# Altium PCB ESP_mudule.pcbdoc (part 4 of 4)
Units mm, origin at the board's own origin, x right, y up, seen from the top; angles counter-clockwise.
Board outline 109.8 x 135.65 mm, 2 copper layers (Top Layer, Bottom Layer); 176 components, 188 nets, 748 pads, 392 vias.
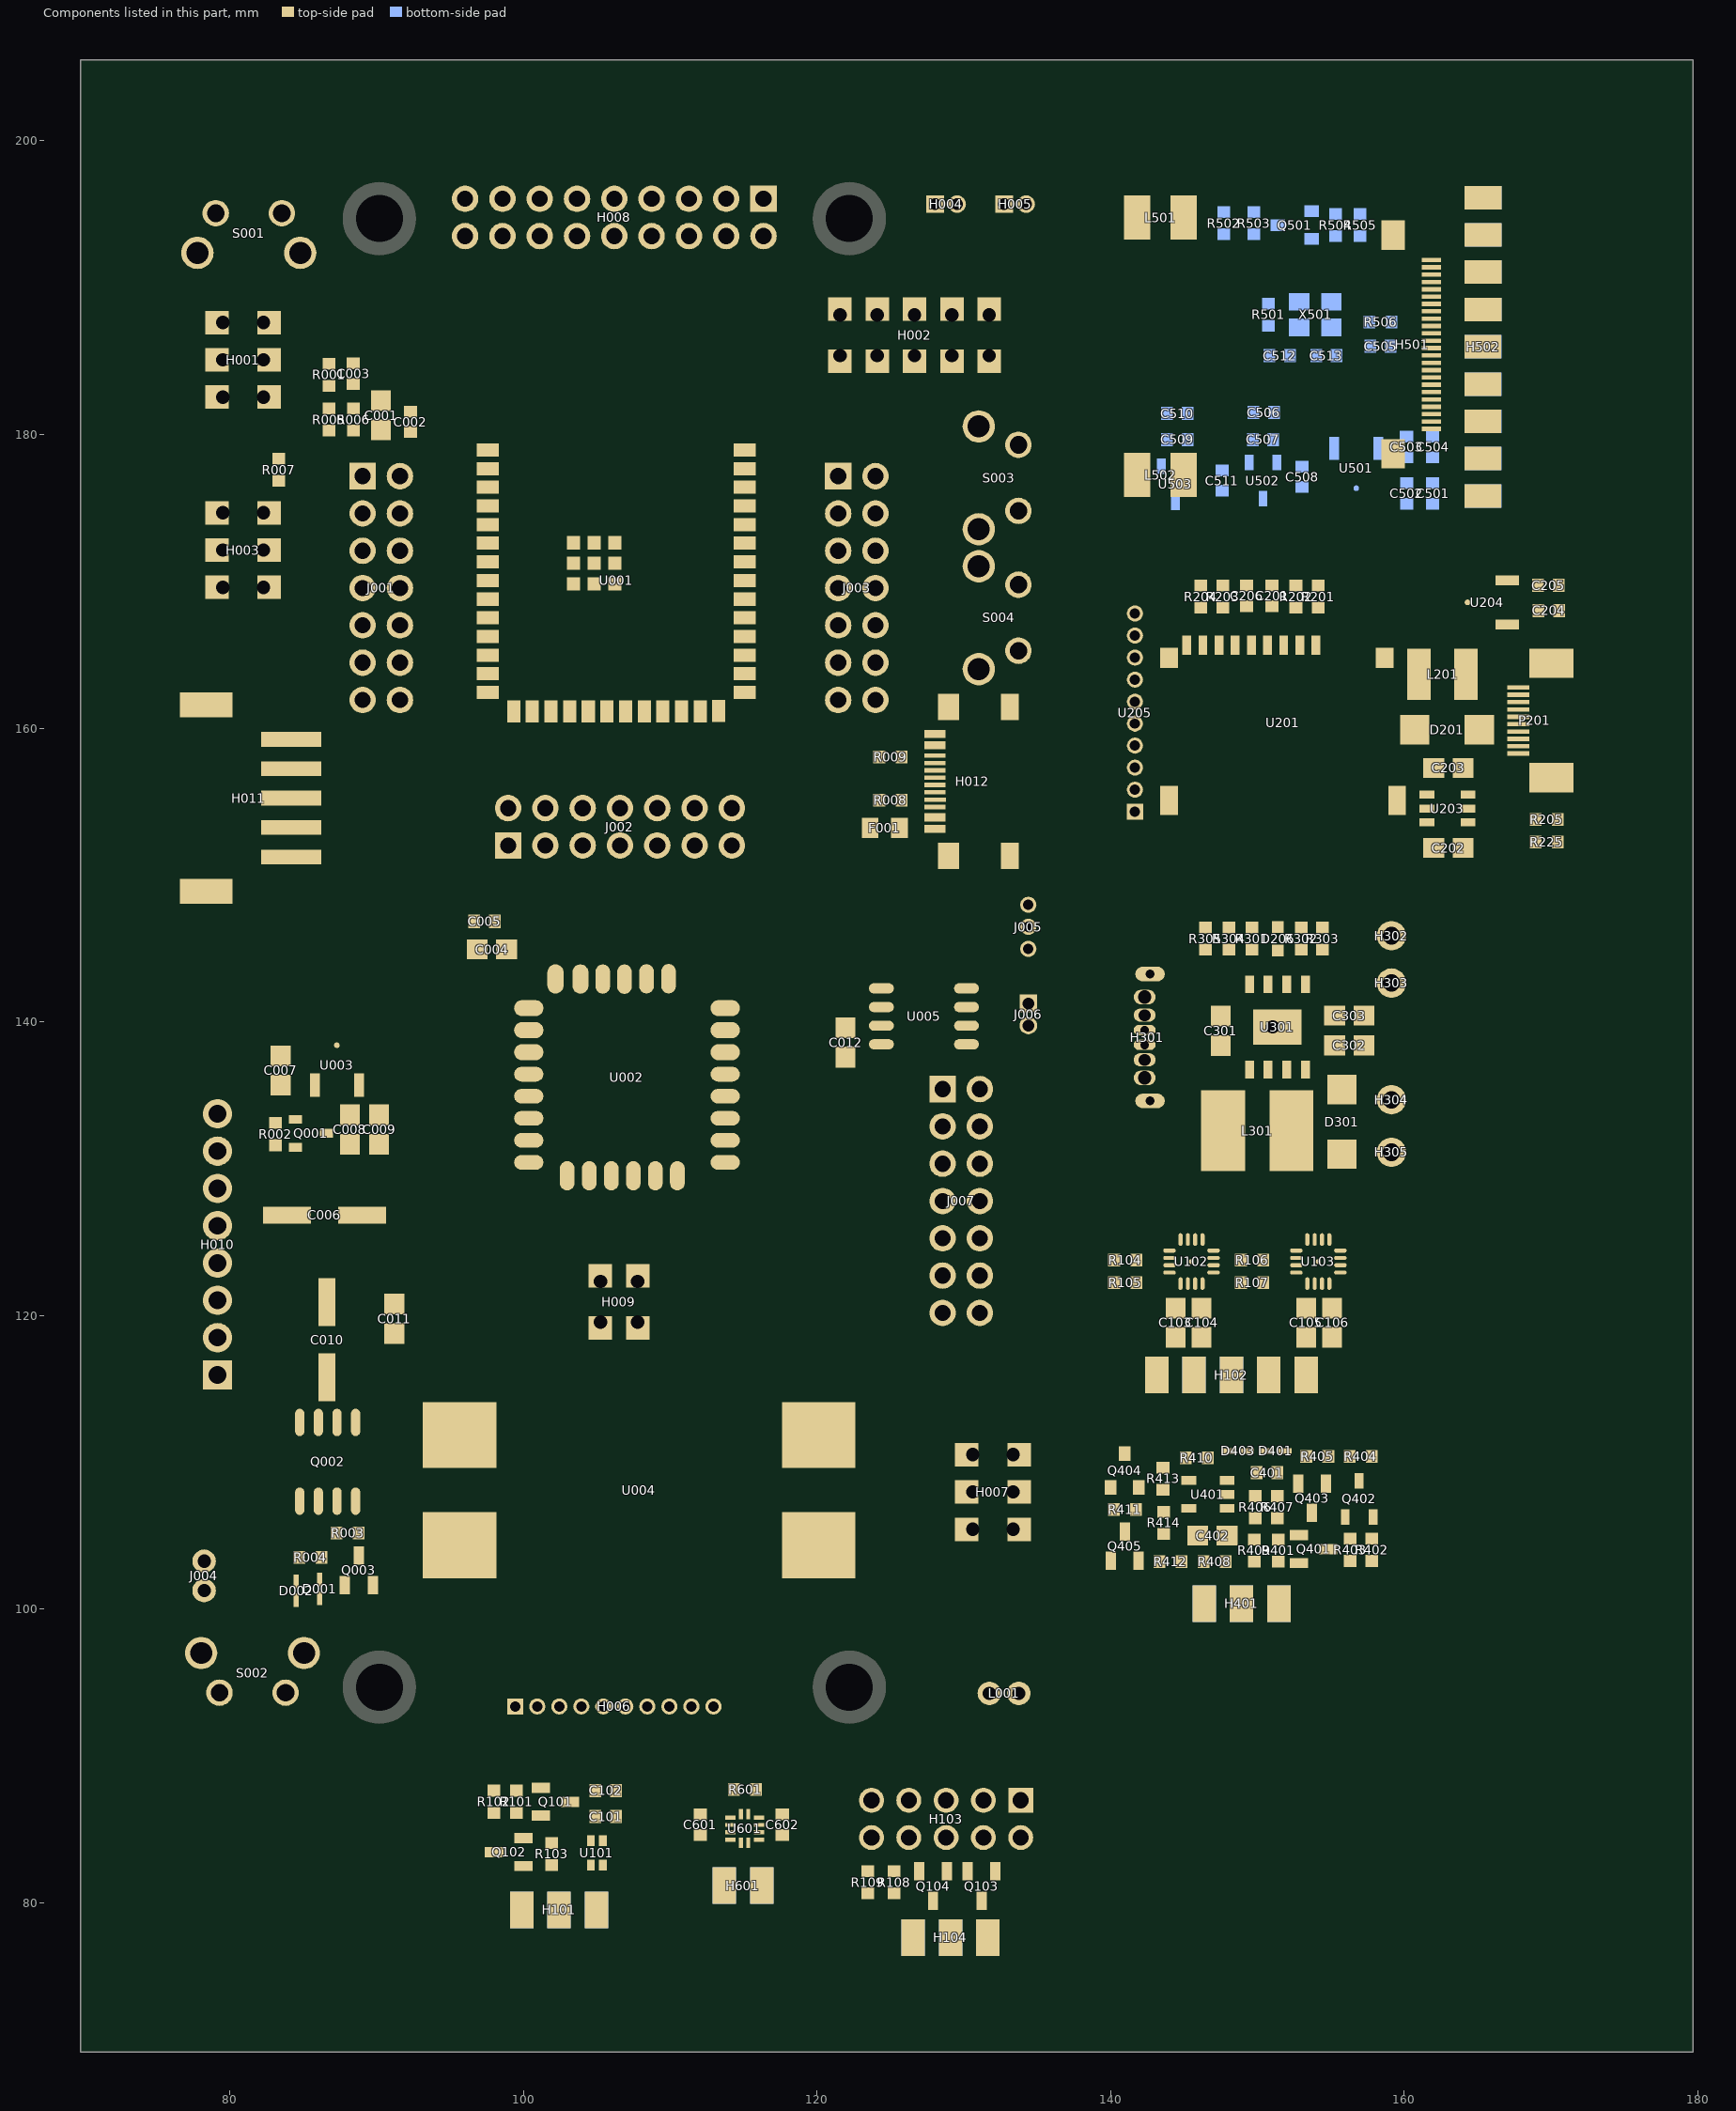
[diagram p4: the components of this part, seen from the top]

## Polygon pours and split planes (outlines as drawn) (continued)
MIC_GND on Top Layer (solid, remove dead copper, pour order 138): 100.622,83.195 100.622,84.725 100.673,84.776 98.939,84.776 98.888,84.725 98.888,83.246 98.939,83.195
DEBUG_5V0 on Top Layer (solid, remove dead copper, pour order 140): 127.372,76.2 127.372,79.661 127.236,79.796 125.81,79.796 125.759,79.745 125.759,76.215 125.774,76.2
DEBUG_3V3 on Top Layer (solid, remove dead copper, pour order 142): 132.185,83.57 132.185,87.701 132.032,87.854 130.553,87.854 130.451,87.752 130.451,85.508 130.247,85.304 128.258,85.304 127.901,84.947 127.901,84.08 128.207,83.774 128.87,83.774 129.023,83.621 131.93,83.621 131.981,83.57
DEBUG_RTS on Top Layer (solid, remove dead copper, pour order 144): 127.34,81.53 127.34,82.805 127.136,83.009 127.136,85.202 127.034,85.304 125.555,85.304 125.402,85.151 125.402,83.06 124.994,82.652 124.79,82.652 124.79,81.721 126.385,81.721 126.575,81.53
DEBUG_DTR on Top Layer (solid, remove dead copper, pour order 146): 123.923,81.734 123.923,83.264 124.586,83.927 124.586,85.253 124.535,85.304 122.856,85.304 122.856,81.832 122.954,81.734
DEBUG_BOOT on Top Layer (solid, remove dead copper, pour order 148): 131.573,79.49 131.573,80.816 130.4,80.816 130.094,80.51 130.094,79.487 131.57,79.487
DEBUG_RESEST on Top Layer (solid, remove dead copper, pour order 150): 127.544,80.816 129.176,80.816 129.278,80.714 129.278,79.272 129.099,79.093 128.808,79.093 128.666,79.235 127.595,79.235 127.544,79.286
$2N3190 on Top Layer (solid, remove dead copper, pour order 152): 132.287,81.53 132.95,81.53 133.15,81.73 133.15,82.198 133.001,82.346 132.746,82.346 132.524,82.569 132.524,82.856 131.776,82.856 131.776,81.513 132.27,81.513
DEBUG_DTR on Top Layer (solid, remove dead copper, pour order 154): 130.441,81.513 130.458,81.53 131.206,81.53 131.206,81.826 131.42,82.04 131.42,82.844 131.408,82.856 129.941,82.856 129.89,82.805 129.89,81.53 129.907,81.513
DEBUG_5V0 on Top Layer (solid, remove dead copper, pour order 156): 134.786,83.621 134.786,87.854 132.95,87.854 132.95,83.603 134.768,83.603
$1N9696 on Top Layer (solid, remove dead copper, pour order 158): 28 vertices, not listed, extent 77.385,93.233 87.687,108.329
$1N5617 on Top Layer (solid, remove dead copper, pour order 160): 18 vertices, not listed, extent 81.516,132.707 88.299,140.306
VCC on Top Layer (solid, remove dead copper, pour order 162): 86.106,132.095 86.106,134.288 86.208,134.39 88.146,134.39 88.401,134.645 88.401,136.43 88.503,136.532 90.747,136.532 90.849,136.43 90.849,132.962 90.798,132.911 87.177,132.911 87.075,132.809 87.075,132.084 86.117,132.084
+12V on Top Layer (solid, remove dead copper, pour order 164): 22 vertices, not listed, extent 84.321,109.553 98.244,119.6
+5V on Top Layer (solid, remove dead copper, pour order 166): 92.226,114.704 116.226,114.704 116.674,114.256 116.674,109.687 116.757,109.604 127.671,109.604 127.671,115 127.365,115.306 118.756,115.306 117.624,116.438 92.022,116.438 92.022,114.806 92.175,114.653
+5V on Top Layer (solid, remove dead copper, pour order 168): 82.23,127.709 82.23,124.904 82.485,124.649 92.787,124.649 93.246,125.108 93.246,126.026 91.359,126.026 91.053,125.72 85.902,125.72 85.8,125.822 85.8,127.658 85.698,127.76 82.281,127.76
+5V on Top Layer (solid, remove dead copper, pour order 170): 132.975,106.34 135.117,106.34 135.27,106.187 135.27,102.821 134.913,102.464 126.345,102.464 125.835,102.974 125.835,104.504 128.13,104.504 128.436,104.198 132.771,104.198 132.975,104.402
+5V on Top Layer (solid, remove dead copper, pour order 172): 121.245,136.838 129.915,136.838 130.17,136.583 130.17,134.798 130.476,134.492 132.006,134.492 132.057,134.543 132.057,137.45 132.006,137.501 127.54,137.501 126.213,138.827 123.285,138.827 122.775,138.317 121.245,138.317
+5V on Top Layer (solid, remove dead copper, pour order 174): 123.03,153.872 123.03,150.914 123.183,150.761 126.753,150.761 126.804,150.71 126.804,152.087 126.753,152.138 124.509,152.138 124.203,152.444 124.203,153.821 124.152,153.872
+5V on Top Layer (solid, remove dead copper, pour order 176): 19 vertices, not listed, extent 115.431,187.686 132.618,197.019
+5V on Top Layer (solid, remove dead copper, pour order 178): 126.647,182.294 135.081,182.294 135.168,182.382 135.168,183.555 126.753,183.555 126.647,183.449
+5V on Top Layer (solid, remove dead copper, pour order 180): 82.434,132.095 82.434,130.871 82.893,130.412 85.033,130.412 85.239,130.618 85.239,132.095
+5V on Top Layer (solid, remove dead copper, pour order 182): 82.128,151.73 82.128,150.149 82.383,149.894 87.075,149.894 87.228,150.047 87.228,151.628 87.126,151.73
+5V on Top Layer (solid, remove dead copper, pour order 184): 79.935,173.814 76.263,173.814 76.263,177.741 79.833,177.741 79.935,177.639
VCC on Top Layer (solid, remove dead copper, pour order 186): 44 vertices, not listed, extent 78.15,132.656 128.997,147.395
VCC on Top Layer (solid, remove dead copper, pour order 188): 52 vertices, not listed, extent 78.303,176.16 96.867,183.779
ESP_BOOT on Top Layer (solid, remove dead copper, pour order 190): 82.026,173.865 85.596,173.865 85.851,174.12 85.851,174.885 85.8,174.936 84.066,174.936 83.811,175.191 83.811,177.18 83.76,177.231 81.975,177.231 81.924,177.18 81.924,173.967
$1N20758 on Top Layer (solid, remove dead copper, pour order 192): 83.199,93.233 82.74,93.692 82.74,98.894 83.964,100.118 83.964,101.06 84.804,101.06 84.831,101.087 84.831,99.914 83.352,98.435 83.352,95.681 83.607,95.426 84.474,95.426 84.882,95.018 84.882,93.335 84.78,93.233
$1N9668 on Top Layer (solid, remove dead copper, pour order 194): 84.168,101.495 84.27,101.393 84.984,101.393 85.137,101.546 86.31,101.546 86.361,101.597 86.361,102.495 85.361,102.495 85.188,102.668 85.188,104.027 84.168,104.027
$1N9446 on Top Layer (solid, remove dead copper, pour order 196): 85.8,103.127 87.177,103.127 87.381,102.923 87.381,100.985 88.217,100.985 88.217,102.495 88.044,102.668 88.044,103.076 87.075,104.045 85.8,104.045
$1N9369 on Top Layer (solid, remove dead copper, pour order 198): 88.452,103.025 88.452,104.606 88.401,104.657 88.401,106.289 88.248,106.442 88.248,108.329 88.299,108.38 89.217,108.38 89.268,108.329 89.268,103.025
POWER_LOCK on Top Layer (solid, remove dead copper, pour order 200): 85.902,101.189 85.902,99.761 86.004,99.659 90.951,99.659 91.053,99.557 91.535,99.557 91.535,100.095 91.512,100.118 86.463,100.118 86.361,100.22 86.361,101.189
ESP_RESET on Top Layer (solid, remove dead copper, pour order 202): 86.31,184.371 90.209,184.371 90.209,185.674 89.982,185.901 86.565,185.901 86.31,185.646
GND on Top Layer (solid, remove dead copper, pour order 204): 32 vertices, not listed, extent 87.942,164.43 116.094,183.861
GND on Top Layer (solid, remove dead copper, pour order 206): 17 vertices, not listed, extent 76.62,147.701 86.463,170.907
GND on Top Layer (solid, remove dead copper, pour order 208): 86.463,159.636 86.463,160.595 86.752,160.884 92.913,160.884 93.114,161.085 93.114,162.827 84.334,162.827 84.321,162.84 84.321,161.778
GND on Top Layer (solid, remove dead copper, pour order 210): 37 vertices, not listed, extent 115.635,148.925 135.729,166.368
GND on Top Layer (solid, remove dead copper, pour order 212): 128.201,160.771 128.201,160.216 128.079,160.095 127.293,160.095 127.293,159.3 127.314,159.279 128.737,159.279 128.997,159.539 128.997,159.738 129.303,160.044 130.833,160.044 130.833,161.018 128.448,161.018
GND on Top Layer (solid, remove dead copper, pour order 214): 124.611,155.556 122.418,155.556 122.367,155.505 122.367,154.688 122.418,154.637 124.653,154.637 124.653,155.495 124.662,155.505
GND on Top Layer (solid, remove dead copper, pour order 216): 125.325,139.337 123.081,139.337 122.622,138.878 119.817,138.878 119.766,138.929 119.766,140.408 119.868,140.51 122.877,140.51 123.285,140.102 125.325,140.102
GND on Top Layer (solid, remove dead copper, pour order 218): 34 vertices, not listed, extent 76.773,100.73 131.037,111.746
GND on Top Layer (solid, remove dead copper, pour order 220): 22 vertices, not listed, extent 82.791,130.43 91.155,136.532
GND on Top Layer (solid, remove dead copper, pour order 222): 87.228,128.933 87.228,126.281 87.33,126.179 90.696,126.179 91.053,126.536 91.053,128.882 91.002,128.933
GND on Top Layer (solid, remove dead copper, pour order 224): 84.372,122.558 84.372,119.651 84.984,119.039 89.37,119.039 90.441,120.11 102.043,120.11 102.088,120.065 102.088,123.783 94.777,123.783 93.705,122.711 84.78,122.711 84.627,122.558
GND on Top Layer (solid, remove dead copper, pour order 226): 97.938,127.913 98.04,127.811 103.752,127.811 103.854,127.913 103.854,128.219 103.599,128.474 103.599,130.514 103.497,130.616 102.12,130.616 101.916,130.412 101.916,129.443 101.763,129.29 97.938,129.29
GND on Top Layer (solid, remove dead copper, pour order 228): 76.569,148.262 76.569,144.08 77.079,143.57 97.428,143.57 97.581,143.723 97.581,145.559 97.122,146.018 97.122,147.344 81.873,147.344 80.496,148.721 77.028,148.721
VCC on Top Layer (solid, remove dead copper, pour order 230): 134.964,148.007 134.964,148.415 134.709,148.67 127.267,148.67 127.071,148.475 127.071,147.485 127.11,147.446 134.913,147.446 135.015,147.548 135.015,147.956
GND on Top Layer (solid, remove dead copper, pour order 232): 113.34,153.566 120.837,153.566 121.806,154.535 124.662,154.535 124.662,155.629 113.414,155.629 113.289,155.505 113.289,153.617
GND on Top Layer (solid, remove dead copper, pour order 234): 76.404,197.59 76.404,91.692 136.097,91.692 136.188,91.601 136.188,197.478 136.086,197.58 76.416,197.58 76.405,197.59
GND on Top Layer (solid, remove dead copper, pour order 236): 76.404,197.641 76.404,91.793 136.2,91.793 136.2,197.641
P2_5V0 on Top Layer (solid, remove dead copper, pour order 238): 19 vertices, not listed, extent 140.868,150.888 163.461,169.533

## Keep-outs
Top Layer:
  region: 97.331,186.441 115.348,186.441 115.348,180.402 97.331,180.402
  region: 142.902,175.698 142.902,178.758 143.871,178.758 143.871,175.698
  region: 142.8,192.988 142.8,197.476 144.024,197.476 144.024,192.988
  region: 81.414,157.035 86.922,157.035 86.922,151.935 81.414,151.935
  region: 87.942,173.049 93.042,173.049 93.042,163.155 87.942,163.155
  region: 120.343,175.905 125.121,175.905 125.121,163.104 120.343,163.104
  region: 127.314,134.186 132.159,134.186 132.159,121.436 127.314,121.436
Bottom Layer:
  region: 97.331,186.441 115.348,186.441 115.348,180.402 97.331,180.402
  region: 160.604,140.826 157.952,140.826 157.544,141.234 157.544,147.354 160.604,147.354 160.655,147.405 160.655,140.877
Board Outline Layer:
  circle w0.025: c136.749,187.533 r0.5
  region: 137.249,187.533 cw(c136.749,187.533) 136.249,187.533 cw(c136.749,187.533)
  circle w0.025: c136.749,186.275 r0.5
  region: 137.249,186.275 cw(c136.749,186.275) 136.249,186.275 cw(c136.749,186.275)
  circle w0.025: c136.749,185.017 r0.5
  region: 137.249,185.017 cw(c136.749,185.017) 136.249,185.017 cw(c136.749,185.017)
  circle w0.025: c136.749,183.759 r0.5
  region: 137.249,183.759 cw(c136.749,183.759) 136.249,183.759 cw(c136.749,183.759)
  circle w0.025: c138.639,187.533 r0.5
  region: 139.139,187.533 cw(c138.639,187.533) 138.139,187.533 cw(c138.639,187.533)
  circle w0.025: c138.639,186.275 r0.5
  region: 139.139,186.275 cw(c138.639,186.275) 138.139,186.275 cw(c138.639,186.275)
  circle w0.025: c138.639,185.017 r0.5
  region: 139.139,185.017 cw(c138.639,185.017) 138.139,185.017 cw(c138.639,185.017)
  circle w0.025: c138.639,183.759 r0.5
  region: 139.139,183.759 cw(c138.639,183.759) 138.139,183.759 cw(c138.639,183.759)
  circle w0.025: c150.57,171.741 r0.5
  region: 151.07,171.741 cw(c150.57,171.741) 150.07,171.741 cw(c150.57,171.741)
  circle w0.025: c151.828,171.741 r0.5
  region: 152.328,171.741 cw(c151.828,171.741) 151.328,171.741 cw(c151.828,171.741)
  circle w0.025: c153.086,171.741 r0.5
  region: 153.586,171.741 cw(c153.086,171.741) 152.586,171.741 cw(c153.086,171.741)
  circle w0.025: c154.344,171.741 r0.5
  region: 154.844,171.741 cw(c154.344,171.741) 153.844,171.741 cw(c154.344,171.741)
  circle w0.025: c154.344,173.631 r0.5
  region: 154.844,173.631 cw(c154.344,173.631) 153.844,173.631 cw(c154.344,173.631)
  circle w0.025: c153.086,173.631 r0.5
  region: 153.586,173.631 cw(c153.086,173.631) 152.586,173.631 cw(c153.086,173.631)
  circle w0.025: c151.828,173.631 r0.5
  region: 152.328,173.631 cw(c151.828,173.631) 151.328,173.631 cw(c151.828,173.631)
  circle w0.025: c150.57,173.631 r0.5
  region: 151.07,173.631 cw(c150.57,173.631) 150.07,173.631 cw(c150.57,173.631)
  circle w0.025: c136.768,162.367 r0.5
  region: 137.268,162.367 cw(c136.768,162.367) 136.268,162.367 cw(c136.768,162.367)
  circle w0.025: c136.768,161.109 r0.5
  region: 137.268,161.109 cw(c136.768,161.109) 136.268,161.109 cw(c136.768,161.109)
  circle w0.025: c136.768,159.851 r0.5
  region: 137.268,159.851 cw(c136.768,159.851) 136.268,159.851 cw(c136.768,159.851)
  circle w0.025: c136.768,158.593 r0.5
  region: 137.268,158.593 cw(c136.768,158.593) 136.268,158.593 cw(c136.768,158.593)
  circle w0.025: c138.658,158.593 r0.5
  region: 139.158,158.593 cw(c138.658,158.593) 138.158,158.593 cw(c138.658,158.593)
  circle w0.025: c138.658,159.851 r0.5
  region: 139.158,159.851 cw(c138.658,159.851) 138.158,159.851 cw(c138.658,159.851)
  circle w0.025: c138.658,161.109 r0.5
  region: 139.158,161.109 cw(c138.658,161.109) 138.158,161.109 cw(c138.658,161.109)
  circle w0.025: c138.658,162.367 r0.5
  region: 139.158,162.367 cw(c138.658,162.367) 138.158,162.367 cw(c138.658,162.367)
  circle w0.025: c148.029,148.12 r0.5
  region: 148.529,148.12 cw(c148.029,148.12) 147.529,148.12 cw(c148.029,148.12)
  circle w0.025: c149.287,148.12 r0.5
  region: 149.787,148.12 cw(c149.287,148.12) 148.787,148.12 cw(c149.287,148.12)
  circle w0.025: c150.545,148.12 r0.5
  region: 151.045,148.12 cw(c150.545,148.12) 150.045,148.12 cw(c150.545,148.12)
  circle w0.025: c151.803,148.12 r0.5
  region: 152.303,148.12 cw(c151.803,148.12) 151.303,148.12 cw(c151.803,148.12)
  circle w0.025: c151.803,150.01 r0.5
  region: 152.303,150.01 cw(c151.803,150.01) 151.303,150.01 cw(c151.803,150.01)
  circle w0.025: c150.545,150.01 r0.5
  region: 151.045,150.01 cw(c150.545,150.01) 150.045,150.01 cw(c150.545,150.01)
  circle w0.025: c149.287,150.01 r0.5
  region: 149.787,150.01 cw(c149.287,150.01) 148.787,150.01 cw(c149.287,150.01)
  circle w0.025: c148.029,150.01 r0.5
  region: 148.529,150.01 cw(c148.029,150.01) 147.529,150.01 cw(c148.029,150.01)
  circle w0.025: c136.784,139.791 r0.5
  region: 137.284,139.791 cw(c136.784,139.791) 136.284,139.791 cw(c136.784,139.791)
  circle w0.025: c136.784,138.533 r0.5
  region: 137.284,138.533 cw(c136.784,138.533) 136.284,138.533 cw(c136.784,138.533)
  circle w0.025: c136.784,137.275 r0.5
  region: 137.284,137.275 cw(c136.784,137.275) 136.284,137.275 cw(c136.784,137.275)
  circle w0.025: c136.784,136.017 r0.5
  region: 137.284,136.017 cw(c136.784,136.017) 136.284,136.017 cw(c136.784,136.017)
  circle w0.025: c138.674,136.017 r0.5
  region: 139.174,136.017 cw(c138.674,136.017) 138.174,136.017 cw(c138.674,136.017)
  circle w0.025: c138.674,137.275 r0.5
  region: 139.174,137.275 cw(c138.674,137.275) 138.174,137.275 cw(c138.674,137.275)
  circle w0.025: c138.674,138.533 r0.5
  region: 139.174,138.533 cw(c138.674,138.533) 138.174,138.533 cw(c138.674,138.533)
  circle w0.025: c138.674,139.791 r0.5
  region: 139.174,139.791 cw(c138.674,139.791) 138.174,139.791 cw(c138.674,139.791)
  circle w0.025: c147.816,126.912 r0.5
  region: 148.316,126.912 cw(c147.816,126.912) 147.316,126.912 cw(c147.816,126.912)
  circle w0.025: c149.074,126.912 r0.5
  region: 149.574,126.912 cw(c149.074,126.912) 148.574,126.912 cw(c149.074,126.912)
  circle w0.025: c150.332,126.912 r0.5
  region: 150.832,126.912 cw(c150.332,126.912) 149.832,126.912 cw(c150.332,126.912)
  circle w0.025: c151.59,126.912 r0.5
  region: 152.09,126.912 cw(c151.59,126.912) 151.09,126.912 cw(c151.59,126.912)
  circle w0.025: c151.59,128.801 r0.5
  region: 152.09,128.801 cw(c151.59,128.801) 151.09,128.801 cw(c151.59,128.801)
  circle w0.025: c150.332,128.801 r0.5
  region: 150.832,128.801 cw(c150.332,128.801) 149.832,128.801 cw(c150.332,128.801)
  circle w0.025: c149.074,128.801 r0.5
  region: 149.574,128.801 cw(c149.074,128.801) 148.574,128.801 cw(c149.074,128.801)
  circle w0.025: c147.816,128.801 r0.5
  region: 148.316,128.801 cw(c147.816,128.801) 147.316,128.801 cw(c147.816,128.801)
  circle w0.025: c136.768,123.12 r0.5
  region: 137.268,123.12 cw(c136.768,123.12) 136.268,123.12 cw(c136.768,123.12)
  circle w0.025: c136.768,121.862 r0.5
  region: 137.268,121.862 cw(c136.768,121.862) 136.268,121.862 cw(c136.768,121.862)
  circle w0.025: c136.768,120.604 r0.5
  region: 137.268,120.604 cw(c136.768,120.604) 136.268,120.604 cw(c136.768,120.604)
  circle w0.025: c136.768,119.346 r0.5
  region: 137.268,119.346 cw(c136.768,119.346) 136.268,119.346 cw(c136.768,119.346)
  circle w0.025: c138.657,119.346 r0.5
  region: 139.157,119.346 cw(c138.657,119.346) 138.157,119.346 cw(c138.657,119.346)
  circle w0.025: c138.657,120.604 r0.5
  region: 139.157,120.604 cw(c138.657,120.604) 138.157,120.604 cw(c138.657,120.604)
  circle w0.025: c138.657,121.862 r0.5
  region: 139.157,121.862 cw(c138.657,121.862) 138.157,121.862 cw(c138.657,121.862)
  circle w0.025: c138.657,123.12 r0.5
  region: 139.157,123.12 cw(c138.657,123.12) 138.157,123.12 cw(c138.657,123.12)
  circle w0.025: c149.958,111.968 r0.5
  region: 150.458,111.968 cw(c149.958,111.968) 149.458,111.968 cw(c149.958,111.968)
  circle w0.025: c151.216,111.968 r0.5
  region: 151.716,111.968 cw(c151.216,111.968) 150.716,111.968 cw(c151.216,111.968)
  circle w0.025: c152.474,111.968 r0.5
  region: 152.974,111.968 cw(c152.474,111.968) 151.974,111.968 cw(c152.474,111.968)
  circle w0.025: c153.732,111.968 r0.5
  region: 154.232,111.968 cw(c153.732,111.968) 153.232,111.968 cw(c153.732,111.968)
  circle w0.025: c153.681,113.858 r0.5
  region: 154.181,113.858 cw(c153.681,113.858) 153.181,113.858 cw(c153.681,113.858)
  circle w0.025: c152.474,113.858 r0.5
  region: 152.974,113.858 cw(c152.474,113.858) 151.974,113.858 cw(c152.474,113.858)
  circle w0.025: c151.216,113.858 r0.5
  region: 151.716,113.858 cw(c151.216,113.858) 150.716,113.858 cw(c151.216,113.858)
  circle w0.025: c149.958,113.858 r0.5
  region: 150.458,113.858 cw(c149.958,113.858) 149.458,113.858 cw(c149.958,113.858)
  circle w0.025: c136.768,108.585 r0.5
  region: 137.268,108.585 cw(c136.768,108.585) 136.268,108.585 cw(c136.768,108.585)
  circle w0.025: c136.768,107.327 r0.5
  region: 137.268,107.327 cw(c136.768,107.327) 136.268,107.327 cw(c136.768,107.327)
  circle w0.025: c136.768,106.069 r0.5
  region: 137.268,106.069 cw(c136.768,106.069) 136.268,106.069 cw(c136.768,106.069)
  circle w0.025: c136.768,104.811 r0.5
  region: 137.268,104.811 cw(c136.768,104.811) 136.268,104.811 cw(c136.768,104.811)
  circle w0.025: c138.657,104.811 r0.5
  region: 139.157,104.811 cw(c138.657,104.811) 138.157,104.811 cw(c138.657,104.811)
  circle w0.025: c138.657,106.069 r0.5
  region: 139.157,106.069 cw(c138.657,106.069) 138.157,106.069 cw(c138.657,106.069)
  circle w0.025: c138.657,107.327 r0.5
  region: 139.157,107.327 cw(c138.657,107.327) 138.157,107.327 cw(c138.657,107.327)
  circle w0.025: c138.657,108.585 r0.5
  region: 139.157,108.585 cw(c138.657,108.585) 138.157,108.585 cw(c138.657,108.585)
  circle w0.025: c127.466,89.222 r0.5
  region: 127.966,89.222 cw(c127.466,89.222) 126.966,89.222 cw(c127.466,89.222)
  circle w0.025: c128.724,89.222 r0.5
  region: 129.224,89.222 cw(c128.724,89.222) 128.224,89.222 cw(c128.724,89.222)
  circle w0.025: c129.982,89.222 r0.5
  region: 130.482,89.222 cw(c129.982,89.222) 129.482,89.222 cw(c129.982,89.222)
  circle w0.025: c131.24,89.222 r0.5
  region: 131.74,89.222 cw(c131.24,89.222) 130.74,89.222 cw(c131.24,89.222)
  circle w0.025: c131.24,91.112 r0.5
  region: 131.74,91.112 cw(c131.24,91.112) 130.74,91.112 cw(c131.24,91.112)
  circle w0.025: c129.982,91.112 r0.5
  region: 130.482,91.112 cw(c129.982,91.112) 129.482,91.112 cw(c129.982,91.112)
  circle w0.025: c128.724,91.112 r0.5
  region: 129.224,91.112 cw(c128.724,91.112) 128.224,91.112 cw(c128.724,91.112)
  circle w0.025: c127.466,91.112 r0.5
  region: 127.966,91.112 cw(c127.466,91.112) 126.966,91.112 cw(c127.466,91.112)
  circle w0.025: c112.997,89.23 r0.5
  region: 113.497,89.23 cw(c112.997,89.23) 112.497,89.23 cw(c112.997,89.23)
  circle w0.025: c114.255,89.23 r0.5
  region: 114.755,89.23 cw(c114.255,89.23) 113.755,89.23 cw(c114.255,89.23)
  circle w0.025: c115.513,89.23 r0.5
  region: 116.013,89.23 cw(c115.513,89.23) 115.013,89.23 cw(c115.513,89.23)
  circle w0.025: c116.771,89.23 r0.5
  region: 117.271,89.23 cw(c116.771,89.23) 116.271,89.23 cw(c116.771,89.23)
  circle w0.025: c116.771,91.119 r0.5
  region: 117.271,91.119 cw(c116.771,91.119) 116.271,91.119 cw(c116.771,91.119)
  circle w0.025: c115.513,91.119 r0.5
  region: 116.013,91.119 cw(c115.513,91.119) 115.013,91.119 cw(c115.513,91.119)
  circle w0.025: c114.255,91.119 r0.5
  region: 114.755,91.119 cw(c114.255,91.119) 113.755,91.119 cw(c114.255,91.119)
  circle w0.025: c112.997,91.119 r0.5
  region: 113.497,91.119 cw(c112.997,91.119) 112.497,91.119 cw(c112.997,91.119)
  circle w0.025: c100.588,89.243 r0.5
  region: 101.088,89.243 cw(c100.588,89.243) 100.088,89.243 cw(c100.588,89.243)
  circle w0.025: c101.846,89.243 r0.5
  region: 102.346,89.243 cw(c101.846,89.243) 101.346,89.243 cw(c101.846,89.243)
  circle w0.025: c103.104,89.243 r0.5
  region: 103.604,89.243 cw(c103.104,89.243) 102.604,89.243 cw(c103.104,89.243)
  circle w0.025: c104.362,89.243 r0.5
  region: 104.862,89.243 cw(c104.362,89.243) 103.862,89.243 cw(c104.362,89.243)
  circle w0.025: c104.362,91.133 r0.5
  region: 104.862,91.133 cw(c104.362,91.133) 103.862,91.133 cw(c104.362,91.133)
  circle w0.025: c103.104,91.133 r0.5
  region: 103.604,91.133 cw(c103.104,91.133) 102.604,91.133 cw(c103.104,91.133)
  circle w0.025: c101.846,91.133 r0.5
  region: 102.346,91.133 cw(c101.846,91.133) 101.346,91.133 cw(c101.846,91.133)
  circle w0.025: c100.588,91.133 r0.5
  region: 101.088,91.133 cw(c100.588,91.133) 100.088,91.133 cw(c100.588,91.133)
  circle w0.025: c108.462,87.624 r0.5
  region: 108.962,87.624 cw(c108.462,87.624) 107.962,87.624 cw(c108.462,87.624)
  circle w0.025: c108.462,86.366 r0.5
  region: 108.962,86.366 cw(c108.462,86.366) 107.962,86.366 cw(c108.462,86.366)
  circle w0.025: c108.462,85.108 r0.5
  region: 108.962,85.108 cw(c108.462,85.108) 107.962,85.108 cw(c108.462,85.108)
  circle w0.025: c108.462,83.85 r0.5
  region: 108.962,83.85 cw(c108.462,83.85) 107.962,83.85 cw(c108.462,83.85)
  circle w0.025: c110.352,83.85 r0.5
  region: 110.852,83.85 cw(c110.352,83.85) 109.852,83.85 cw(c110.352,83.85)
  circle w0.025: c110.352,85.108 r0.5
  region: 110.852,85.108 cw(c110.352,85.108) 109.852,85.108 cw(c110.352,85.108)
  circle w0.025: c110.352,86.366 r0.5
  region: 110.852,86.366 cw(c110.352,86.366) 109.852,86.366 cw(c110.352,86.366)
  circle w0.025: c110.352,87.624 r0.5
  region: 110.852,87.624 cw(c110.352,87.624) 109.852,87.624 cw(c110.352,87.624)
  circle w0.025: c119.576,87.631 r0.5
  region: 120.076,87.631 cw(c119.576,87.631) 119.076,87.631 cw(c119.576,87.631)
  circle w0.025: c119.576,86.373 r0.5
  region: 120.076,86.373 cw(c119.576,86.373) 119.076,86.373 cw(c119.576,86.373)
  circle w0.025: c119.576,85.115 r0.5
  region: 120.076,85.115 cw(c119.576,85.115) 119.076,85.115 cw(c119.576,85.115)
  circle w0.025: c119.576,83.857 r0.5
  region: 120.076,83.857 cw(c119.576,83.857) 119.076,83.857 cw(c119.576,83.857)
  circle w0.025: c121.465,83.857 r0.5
  region: 121.965,83.857 cw(c121.465,83.857) 120.965,83.857 cw(c121.465,83.857)
  circle w0.025: c121.465,85.115 r0.5
  region: 121.965,85.115 cw(c121.465,85.115) 120.965,85.115 cw(c121.465,85.115)
  circle w0.025: c121.465,86.373 r0.5
  region: 121.965,86.373 cw(c121.465,86.373) 120.965,86.373 cw(c121.465,86.373)
  circle w0.025: c121.465,87.631 r0.5
  region: 121.965,87.631 cw(c121.465,87.631) 120.965,87.631 cw(c121.465,87.631)
  region: 136.218,183.145 139.219,183.145 139.219,162.979 136.218,162.979
  region: 139.095,174.191 149.958,174.191 149.958,171.162 139.095,171.162
  region: 136.219,157.979 139.235,157.979 139.235,140.403 136.219,140.403
  region: 138.993,150.571 147.417,150.571 147.417,147.548 138.993,147.548
  region: 136.235,135.403 139.218,135.403 139.218,123.732 136.235,123.732
  region: 138.432,129.377 147.164,129.377 147.164,126.383 138.432,126.383
  region: 136.218,118.732 139.218,118.732 139.218,109.197 136.218,109.197
  region: 139.211,117.353 142.131,117.353 142.131,111.398 139.211,111.398
  region: 141.105,114.419 149.22,114.419 149.22,111.398 141.105,111.398
  region: 104.976,91.694 112.371,91.694 112.371,88.623 104.976,88.623
  region: 107.903,88.674 110.913,88.674 110.913,88.236 107.903,88.236
  region: 117.367,91.692 126.854,91.692 126.854,88.673 117.367,88.673
  region: 119.026,88.646 122.062,88.646 122.062,88.243 119.026,88.243
  lines w0.025: 104.976,88.623 112.371,88.623 112.371,91.694 104.976,91.694 104.976,88.623 ; 107.903,88.236 110.913,88.236 110.913,88.674 107.903,88.674 107.903,88.236 ; 117.367,88.673 126.854,88.673 126.854,91.692 117.367,91.692 117.367,88.673 ; 119.026,88.243 122.062,88.243 122.062,88.646 119.026,88.646 119.026,88.243 ; 136.218,109.197 139.218,109.197 139.218,118.732 136.218,118.732 136.218,109.197 ; 136.219,140.403 139.235,140.403 139.235,157.979 136.219,157.979 136.219,140.403 ; 136.218,162.979 139.219,162.979 139.219,183.145 136.218,183.145 136.218,162.979 ; 136.235,123.732 139.218,123.732 139.218,135.403 136.235,135.403 136.235,123.732 ; 138.432,126.383 147.164,126.383 147.164,129.377 138.432,129.377 138.432,126.383 ; 138.993,147.548 147.417,147.548 147.417,150.571 138.993,150.571 138.993,147.548 ; 139.095,171.162 149.958,171.162 149.958,174.191 139.095,174.191 139.095,171.162 ; 139.211,111.398 142.131,111.398 142.131,117.353 139.211,117.353 139.211,111.398 ; 141.105,111.398 149.22,111.398 149.22,114.419 141.105,114.419 141.105,111.398
  lines w0.1: 136.218,91.673 131.835,91.673 131.835,88.646 136.086,88.646 136.086,79.616 136.074,79.603 132.926,79.603 132.926,76.2 125.237,76.2 125.237,79.603 122.026,79.603 122.026,83.243 119.026,83.243 119.026,83.035 117.502,83.035 117.502,79.701 112.43,79.701 112.43,83.035 110.906,83.035 110.906,83.236 107.903,83.236 107.903,80.927 105.925,80.927 105.925,78.133 98.959,78.133 98.959,80.927 96.981,80.927 96.981,88.694 99.976,88.694 99.976,91.692 76.2,91.692 76.2,197.692 136.2,197.692 136.2,188.145 139.188,188.145 139.188,197.724 139.197,197.733 ; 136.218,91.692 136.218,104.197 139.232,104.197 139.232,102.356 145.34,102.356 145.34,98.947 152.486,98.947 152.486,102.35 158.594,102.35 158.594,111.419 154.324,111.419 154.324,117.353 157.245,117.353 157.245,126.362 152.198,126.362 152.198,129.377 160.91,129.377 160.91,147.571 152.417,147.571 152.417,150.571 173.194,150.571 173.194,171.192 154.958,171.192 154.958,174.191 163.453,174.191 163.453,174.826 166.755,174.826 166.755,186.002 ; 139.196,197.743 163.453,197.743 163.453,197.108 166.755,197.108 166.755,185.932

## Other copper
Top Layer:
  drawing of 759 lines, arcs and shapes, not listed
Bottom Layer:
  drawing of 340 lines, arcs and shapes, not listed

## Silkscreen, mask and mechanical layers (free items; w line width, h text height)
Top Silkscreen Layer:
  region: 98.58,180.252 114.201,180.252 114.201,161.964 98.58,161.964
  region: 101.501,141.771 112.677,141.771 112.677,130.722 101.501,130.722
  lines w0.1: 99.976,88.694 104.976,88.694 104.976,91.694 99.976,91.694 99.976,88.694 ; 107.913,83.236 107.913,88.236 110.913,88.236 110.913,83.236 107.913,83.236 ; 112.385,88.68 117.385,88.68 117.385,91.68 112.385,91.68 112.385,88.68 ; 119.026,83.243 119.026,88.243 122.026,88.243 122.026,83.243 119.026,83.243 ; 126.854,88.673 131.854,88.673 131.854,91.673 126.854,91.673 126.854,88.673 ; 136.188,183.145 139.188,183.145 139.188,188.145 136.188,188.145 136.188,183.145 ; 136.218,104.197 136.218,109.197 139.218,109.197 139.218,104.197 136.218,104.197 ; 136.218,118.732 136.218,123.732 139.218,123.732 139.218,118.732 136.218,118.732 ; 136.219,157.979 136.219,162.979 139.219,162.979 139.219,157.979 136.219,157.979 ; 136.235,135.403 139.235,135.403 139.235,140.403 136.235,140.403 136.235,135.403 ; 140.266,181.968 148.466,181.968 148.466,190.168 140.266,190.168 140.266,181.968 ; 147.204,126.362 152.204,126.362 152.204,129.362 147.204,129.362 147.204,126.362 ; 147.417,147.571 152.417,147.571 152.417,150.571 147.417,150.571 147.417,147.571 ; 149.346,111.419 154.346,111.419 154.346,114.419 149.346,114.419 149.346,111.419 ; 149.958,171.192 154.958,171.192 154.958,174.192 149.958,174.192 149.958,171.192
  text "SPEAKER" at 128.997,192.174 h1
  text "RESET" at 79.68,191.307 h1
  text "OV2640" at 103.995,190.751 h1
  text "PDM" at 78.048,179.883 h1
  text "UP" at 130.119,177.027 h1 r270
  text "IO1" at 125.631,176.823 h1
  text "IO4" at 93.119,176.569 h1
  text "VCC" at 117.854,176.569 h1
  text "VCC" at 85.7,176.442 h1
  text "IO42" at 125.631,174.262 h1
  text "IO6" at 93.119,174.051 h1
  text "IO02" at 117.854,174.029 h1
  text "IO5" at 85.7,173.267 h1
  text "IO40" at 125.631,171.701 h1
  text "IO15" at 93.119,171.532 h1
  text "IO41" at 117.854,171.489 h1
  text "IO7" at 85.7,170.727 h1
  text "GND" at 141.99,170.706 h1 r180
  text "IO38" at 125.631,169.14 h1
  text "IO16" at 85.7,169.076 h1
  text "IO17" at 93.119,169.013 h1
  text "IO39" at 117.854,168.949 h1
  text "DOWN" at 130.323,168.765 h1 r270
  text "IO36" at 125.631,166.579 h1
  text "IO8" at 93.119,166.494 h1
  text "IO18" at 85.7,166.409 h1
  text "IO37" at 117.854,166.409 h1
  text "IO19" at 85.7,163.996 h1
  text "IO0" at 125.631,164.018 h1
  text "IO20" at 93.119,163.975 h1
  text "IO35" at 117.854,163.869 h1
  text "DEBUG" at 79.374,163.716 h1
  text "GND" at 93.119,161.456 h1
  text "GND" at 125.631,161.456 h1
  text "GND" at 117.854,161.329 h1
  text "GND" at 85.7,161.309 h1
  text "IO3" at 99.469,156.376 h1 r90
  text "GND" at 114.709,156.376 h1 r90
  text "IO9" at 102.136,156.249 h1 r90
  text "IO13" at 107.089,156.249 h1 r90
  text "IO11" at 104.422,156.122 h1 r90
  text "IO21" at 109.756,156.122 h1 r90
  text "IO48" at 112.169,156.122 h1 r90
  text "PRINTER" at 88.707,152.75 h1 r90
  text "5V" at 141.888,152.447 h1 r180
  text "IO14" at 109.756,148.629 h1 r90
  text "IO10" at 104.549,148.502 h1 r90
  text "IO12" at 107.089,148.502 h1 r90
  text "VCC" at 99.596,148.375 h1 r90
  text "IO47" at 112.296,148.375 h1 r90
  text "IO46" at 102.136,148.248 h1 r90
  text "IO45" at 114.963,148.248 h1 r90
  text "VCC" at 129.9,147.456 h1
  text "ADC" at 129.9,145.85 h1
  text "GND" at 129.9,144.243 h1
  text "B+" at 158.564,139.398 h1.5
  text "RC522" at 83.138,139.297 h1 r90
  text "B-" at 158.615,136.515 h1.5
  text "5V" at 132.743,135.04 h1
  text "VCC" at 124.488,134.786 h1
  text "PWM13" at 132.743,132.481 h1
  text "SDA" at 124.488,132.225 h1
  text "PWM12" at 132.743,129.921 h1
  text "SCL" at 124.488,129.664 h1
  text "PWM11" at 132.743,127.361 h1
  text "INT2" at 124.488,127.103 h1
  text "PWM10" at 132.743,124.801 h1
  text "INT3" at 124.488,124.542 h1
  text "PWM9" at 132.743,122.241 h1
  text "PWM7" at 124.488,121.981 h1
  text "GND" at 132.743,119.681 h1
  text "PWM8" at 124.488,119.419 h1
  text "RESERVE" at 125.948,117.417 h1
  text "B-" at 81.332,102.597 h2
  text "B+" at 81.376,99.945 h2
  text "POWER-ON" at 86.616,97.976 h1
  text "5V" at 134.527,97.527 h1
  text "5V" at 97.605,92.582 h1 r90
  text "GND" at 115.758,92.592 h1 r90
  text "COIL" at 127.161,92.468 h1
Mechanical Layer:
  drawing of 164 lines, arcs and shapes, not listed

## Text inside footprints (layer, text, board x,y; h text height)
H001: Top Silkscreen Layer "DAT" at 85.499,183.173 h1 r180; Top Silkscreen Layer "CLK" at 85.499,185.713 h1 r180; Top Silkscreen Layer "EN" at 85.372,187.999 h1 r180; Top Silkscreen Layer "VCC" at 78.26,183.046 h1 r180; Top Silkscreen Layer "NC" at 78.133,185.713 h1 r180; Top Silkscreen Layer "GND" at 78.26,188.126 h1 r180
H002: Top Silkscreen Layer "LRCK" at 124.615,181.649 h1 r90; Top Silkscreen Layer "DIN" at 127.155,181.649 h1 r90; Top Silkscreen Layer "EN" at 129.695,181.649 h1 r90; Top Silkscreen Layer "S1P" at 122.073,189.55 h1 r90; Top Silkscreen Layer "S1N" at 124.611,189.55 h1 r90; Top Silkscreen Layer "S2P" at 127.149,189.55 h1 r90; Top Silkscreen Layer "BLCK" at 122.075,181.649 h1 r90; Top Silkscreen Layer "VCC" at 132.235,189.523 h1 r90; Top Silkscreen Layer "GND" at 132.235,181.649 h1 r90; Top Silkscreen Layer "S2N" at 129.687,189.55 h1 r90
H003: Top Silkscreen Layer "5V" at 76.99,174.029 h1; Top Silkscreen Layer "RX" at 76.99,171.616 h1; Top Silkscreen Layer "TX" at 76.99,169.203 h1; Top Silkscreen Layer "BOOT" at 83.594,174.156 h1; Top Silkscreen Layer "RESET" at 83.594,171.616 h1; Top Silkscreen Layer "GND" at 83.594,169.076 h1
H007: Top Silkscreen Layer "5V" at 135.918,106.084 h1 r180; Top Silkscreen Layer "EN" at 135.918,108.497 h1 r180; Top Silkscreen Layer "SI" at 135.918,110.91 h1 r180; Top Silkscreen Layer "L" at 129.314,105.957 h1 r180; Top Silkscreen Layer "ADC" at 129.314,108.497 h1 r180; Top Silkscreen Layer "GND" at 129.314,111.037 h1 r180
H009: Top Silkscreen Layer "SDA" at 104.615,125.515 h1 r270; Top Silkscreen Layer "VCC" at 107.155,125.515 h1 r270; Top Silkscreen Layer "SCL" at 104.615,118.149 h1 r270; Top Silkscreen Layer "GND" at 107.216,118.276 h1 r270
H010: Top Silkscreen Layer "CS" at 80.038,111.926 h2 r90; Top Silkscreen Layer "VCC" at 80.292,135.294 h2 r90
U002: Top Silkscreen Layer "PC1" at 114.953,131.625 h0.6; Top Silkscreen Layer "PC3" at 114.953,134.631 h0.6; Top Silkscreen Layer "PC4" at 114.953,136.134 h0.6; Top Silkscreen Layer "PC5" at 114.953,137.637 h0.6; Top Silkscreen Layer "PC0" at 114.953,130.122 h0.6; Top Silkscreen Layer "PC6" at 114.953,139.14 h0.6; Top Silkscreen Layer "PC7" at 114.953,140.643 h0.6; Top Silkscreen Layer "PC2" at 114.953,133.128 h0.6; Top Silkscreen Layer "VDD" at 110.264,128.309 h0.6 r270; Top Silkscreen Layer "MOSI" at 109.593,146.139 h0.6 r270; Top Silkscreen Layer "PB4" at 108.74,128.309 h0.6 r270; Top Silkscreen Layer "CLK" at 108.031,146.139 h0.6 r270; Top Silkscreen Layer "PB3" at 107.216,128.309 h0.6 r270; Top Silkscreen Layer "MISO" at 106.468,146.139 h0.6 r270; Top Silkscreen Layer "PB2" at 105.692,128.309 h0.6 r270; Top Silkscreen Layer "CS" at 104.906,146.139 h0.6 r270; Top Silkscreen Layer "PB1" at 104.168,128.309 h0.6 r270; Top Silkscreen Layer "VDD" at 103.344,146.139 h0.6 r270; Top Silkscreen Layer "GND" at 102.644,128.309 h0.6 r270; Top Silkscreen Layer "PA0" at 101.782,146.139 h0.6 r270; Top Silkscreen Layer "PA4" at 97.613,136.118 h0.6; Top Silkscreen Layer "PA5" at 97.613,134.615 h0.6; Top Silkscreen Layer "PA3" at 97.613,137.622 h0.6; Top Silkscreen Layer "PA2" at 97.613,139.125 h0.6; Top Silkscreen Layer "PA6" at 97.613,133.111 h0.6; Top Silkscreen Layer "PA7" at 97.613,131.608 h0.6; Top Silkscreen Layer "PB0" at 97.613,130.104 h0.6; Top Silkscreen Layer "PA1" at 97.613,140.628 h0.6
U004: Top Silkscreen Layer "VIN" at 91.849,114.339 h1.5; Top Silkscreen Layer "+5V" at 121.821,114.466 h1.5; Top Silkscreen Layer "GND" at 91.722,100.369 h1.5; Top Silkscreen Layer "GND" at 121.694,100.369 h1.5